# Allegro board CY15FRAMKIT-001 Layout.brd
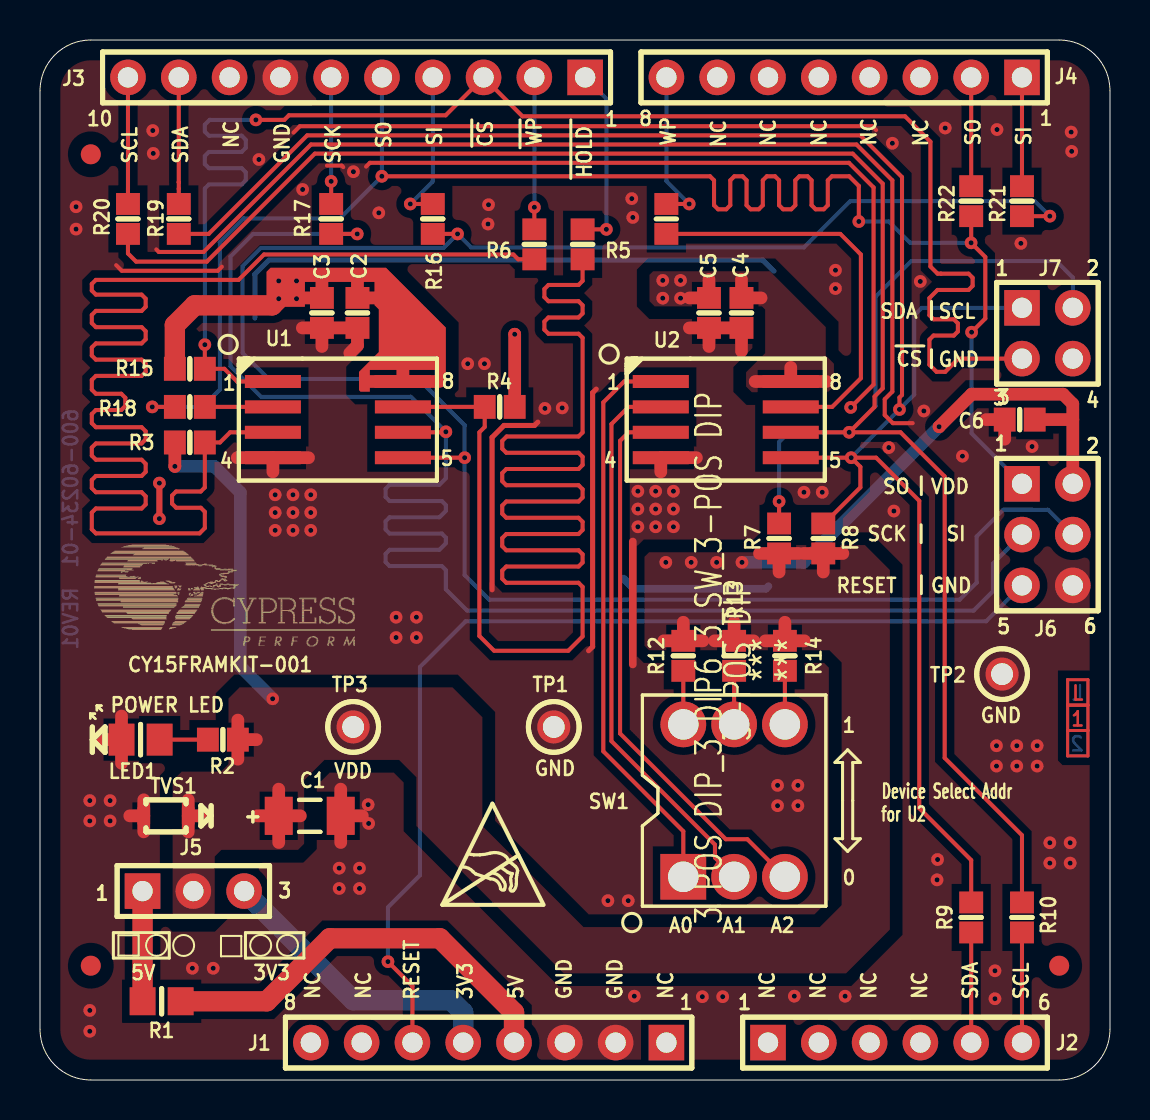
[diagram p0: board, top side]
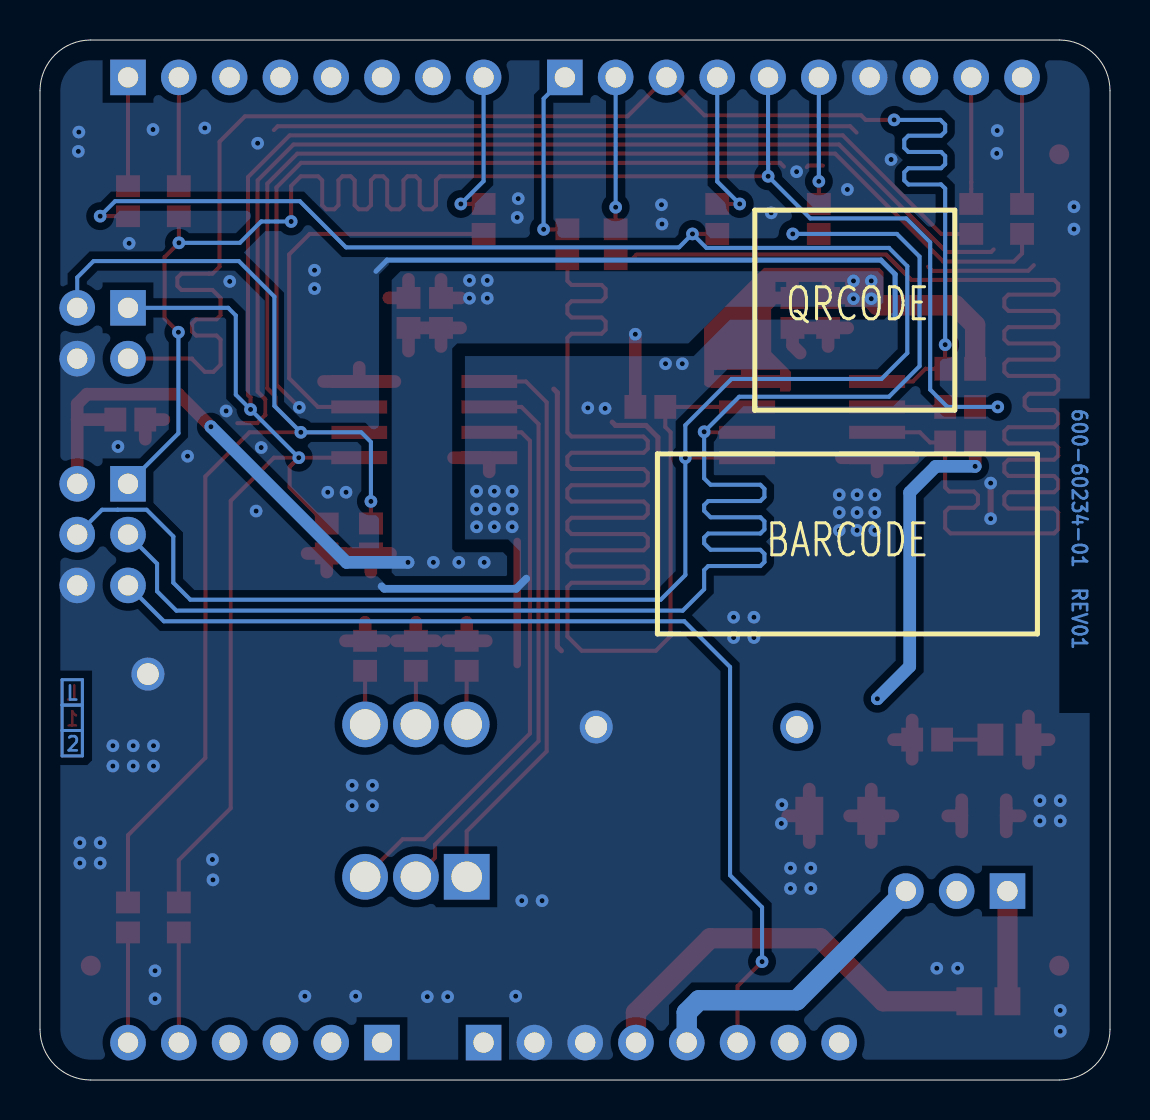
[diagram p1: board, bottom side, seen from below]

Outline 53.5 x 52 mm; copper layers: TOP, BOTTOM. Coordinates in mm from the lower left corner of the outline.
Outline path: 0,49.46 arc(0.74,51.26) 2.54,52 50.96,52 arc(52.76,51.26) 53.5,49.46 53.5,2.54 arc(52.76,0.74) 50.96,0 2.54,0 arc(0.74,0.74) 0,2.54 0,49.46

## Design rules (mm)
net group GRP2: nets SCL SDA
net group PWR_PH: nets 3V3 5V
net group GRP1: nets A0 A1 A2
net group GRP3: nets CS# HOLD# SCK SI SO WP#
nets with their own width: min track width 0.635; nets VDD VSS

## Placement (name value [footprint] x y rotation side)
C1  10 uF  [RC1206]  13.49 13.21 0 top
C2  0.1 uF  [C-CC0603]  15.88 38.35 270 top
C3  1 uF  [C-CC0603]  14.1 38.35 270 top
C4  0.1 uF  [C-CC0603]  35.08 38.35 270 top
C5  1 uF  [C-CC0603]  33.45 38.35 270 top
C6  0.1 uF  [C-CC0603]  48.99 33.02 180 top
J1  8x1 RECP  [RECP8X1-VERT]  31.32 1.87 270 top
J2  6x1 RECP  [HDR6X1]  36.4 1.87 270 top
J3  10x1 RECP  [RECP10X1-VERT]  27.26 50.13 270 top
J4  8x1 RECP  [RECP8X1-VERT]  49.1 50.13 270 top
J5  3 Pin Header  [HDR3X1]  5.13 9.45 270 top
J6  3X2 CONN FEMALE  [RECPT3X2_100]  49.1 29.81 0 top
J7  2X2 CONN FEMALE  [RECPT2X2_100]  49.1 38.61 0 top
LED1  Power LED Green  [CR-LED0805_A1K2]  5.03 17.02 0 top
NOREF  -  [unnamed]  50.96 5.71 0 top
NOREF#2  -  [#2]  -122.27 -285.33 0 top
NOREF#3  -  [#2]  309.53 -209.13 0 top
NOREF#4  -  [#2]  243.15 20.04 0 top
NOREF#5  -  [#2]  4.07 0 90 top
NOREF#6  -  [#2]  0 49.02 0 top
NOREF#7  -  [#2]  52.86 51.15 0 top
NOREF#8  -  [unnamed]  2.54 5.71 0 top
NOREF#9  -  [unnamed]  2.54 46.29 0 top
R1  0E  [R-CR0805]  6.08 3.94 180 top
R2  220 Ohm  [C-CC0603]  9.14 17.02 180 top
R3  4.7k  [C-CC0603]  7.49 31.88 0 top
R4  4.7k  [C-CC0603]  22.99 33.66 180 top
R5  0E  [C-CC0603]  27.13 41.78 90 top
R6  0E  [C-CC0603]  24.72 41.78 90 top
R7  4.7k  [C-CC0603]  36.96 27.08 90 top
R8  4.7k  [C-CC0603]  39.17 27.08 90 top
R9  30E  [C-CC0603]  46.56 8.13 270 top
R10  30E  [C-CC0603]  49.1 8.13 270 top
R11  0E  [C-CC0603]  31.32 43.05 90 top
R12  4.7k  [C-CC0603]  32.17 21.21 90 top
R13  4.7k  [C-CC0603]  34.71 21.21 90 top
R14  4.7k  [C-CC0603]  37.25 21.21 90 top
R15  4.7k  [C-CC0603]  7.49 35.56 0 top
R16  30E  [C-CC0603]  19.64 43.05 90 top
R17  30E  [C-CC0603]  14.56 43.05 90 top
R18  30E  [C-CC0603]  7.49 33.66 0 top
R19  30E  [C-CC0603]  6.94 43.05 90 top
R20  30E  [C-CC0603]  4.4 43.05 90 top
R21  30E  [C-CC0603]  49.1 43.94 90 top
R22  30E  [C-CC0603]  46.56 43.94 90 top
SW1  3-POS DIP  [DIP6_3_SW]  32.17 10.16 90 top
TP1  BLACK  [TP-43R_S]  25.69 17.65 0 top
TP2  BLACK  [TP-43R_S]  48.11 20.29 0 top
TP3  BLACK  [TP-43R_S]  15.66 17.65 0 top
TVS1  5V 350W  [SOD323]  6.3 13.21 180 top
U1  SPI F-RAM  [SOIC127P_800_600_8]  14.9 33.02 0 top
U2  I2C F-RAM  [SOIC127P_800_600_8]  34.29 33.02 0 top

## Library data of the parts
C1-C6 = C
J1 = CON6_1: room: USB
J2 = CON6_2
J3 = 10 PIN CON_0
J4 = 8 PIN CON_0
J5 = 3 PIN CON_5
J6 = CON6A_0
J7 = CON4AP_0
LED1 = LED_1
R1-R22 = R
SW1 = 3 POS DIP_3: Tolerance: ***; User Part Number: ***
TP1-TP3 = T POINT R
TVS1 = TVS 5V SOD-323_0
U1 = 8SOIC-SOCKET-208 mils_4
U2 = 8SOIC-SOCKET-150 mils_4

## Footprints (pads in the part's own frame, mm; a bottom-side part is the same pattern mirrored in y, then rotated)
C-CC0603
  rect 1.092x1.194 smd: 1(-0.749,0) 2(0.749,0)
CR-LED0805_A1K2
  rect 1.295x1.6 smd: 1(0.953,0) 2(-0.953,0)
DIP6_3_SW
  rect 2.286x2.286 hole 1.524: 1(0,0)
  round 2.286 hole 1.524: 2(7.62,0) 3(0,-2.54) 4(7.62,-2.54) 5(0,-5.08) 6(7.62,-5.08)
HDR3X1
  rect 1.778x1.778 hole 1.016: 1(0,0)
  round 1.778 hole 1.016: 2(0,2.54) 3(0,5.08)
HDR6X1
  rect 1.778x1.778 hole 1.016: 1(0,0)
  round 1.778 hole 1.016: 2(0,2.54) 3(0,5.08) 4(0,7.62) 5(0,10.16) 6(0,12.7)
R-CR0805
  rect 1.295x1.397 smd: 1(-0.952,0) 2(0.952,0)
RC1206
  rect 1.397x1.905 smd: 1(-1.55,0) 2(1.55,0)
RECP8X1-VERT
  rect 1.778x1.778 hole 1.016: 1(0,0)
  round 1.778 hole 1.016: 2(0,-2.54) 3(0,-5.08) 4(0,-7.62) 5(0,-10.16) 6(0,-12.7) 7(0,-15.24) 8(0,-17.78)
RECP10X1-VERT
  rect 1.778x1.778 hole 1.016: 1(0,0)
  round 1.778 hole 1.016: 2(0,-2.54) 3(0,-5.08) 4(0,-7.62) 5(0,-10.16) 6(0,-12.7) 7(0,-15.24) 8(0,-17.78) 9(0,-20.32) 10(0,-22.86)
RECPT2X2_100
  rect 1.778x1.778 hole 1.016: 1(0,0)
  round 1.778 hole 1.016: 2(2.54,0) 3(0,-2.54) 4(2.54,-2.54)
RECPT3X2_100
  rect 1.778x1.778 hole 1.016: 1(0,0)
  round 1.778 hole 1.016: 2(2.54,0) 3(0,-2.54) 4(2.54,-2.54) 5(0,-5.08) 6(2.54,-5.08)
SOD323
  rect 0.635x0.838 smd: 1(-1.113,0) 2(1.113,0)
SOIC127P_800_600_8
  rect 2.8x0.65 smd: 1(-3.25,1.905) 2(-3.25,0.635) 3(-3.25,-0.635) 4(-3.25,-1.905) 5(3.25,-1.905) 6(3.25,-0.635) 7(3.25,0.635) 8(3.25,1.905)
TP-43R_S
  round 1.651 hole 1.092: 1(0,0)
unnamed
  round 1 smd: (0,0)

## Nets
3V3: J1.5 J5.3
5V: J1.4 R1.1
VDD: C1.1 C2.1 C3.1 C4.1 C5.1 C6.1 J5.2 J6.2 R2.1 R3.1 R4.1 R7.1 R8.1 R12.2 R13.2 R14.2 R15.1 TP3.1(TP) TVS1.1(K) U1.8(VDD) U2.8(VDD)
VSS: C1.2 C2.2 C3.2 C4.2 C5.2 C6.2 J1.2 J1.3 J3.7 J6.6 J7.4 LED1.2(CATHODE) TP1.1(TP) TP2.1(TP) TVS1.2(A) U1.4(VSS) U2.4(VSS)
A0: SW1.1 U2.1(A0)
A1: SW1.3 U2.2(A1)
A2: SW1.5 U2.3(A2)
CS#: J3.3 J7.3 R15.2 U1.1(C\S\)
HOLD#: R4.2 R5.1 U1.7(H\O\L\D\)
RESET: J1.6 J6.5
SCK: J6.3 R17.1 U1.6(SCK)
SCL: J7.2 R7.2 R10.1 R20.1 U2.6(SCL)
SDA: J7.1 R8.2 R9.1 R19.1 U2.5(SDA)
SI: J6.4 R16.1 R21.1 U1.5(SI)
SO: J3.5 J6.1 R18.1 R22.1
WP: R11.1 U2.7(WP)
WP#: R3.2 R6.1 U1.3(W\P\)
N02914: LED1.1(ANODE) R2.2
N202221: R18.2 U1.2(SO)
N13079348: J2.5 R9.2
N13079350: J2.6 R10.2
N13080850: J3.2 R6.2
N13080876: J3.1 R5.2
N13080976: J4.8 R11.2
N13083260: J5.1 R1.2
N13171746: R12.1 SW1.2
N13171894: R13.1 SW1.4
N13171898: R14.1 SW1.6
N13187522: J3.4 R16.2
N13187530: J3.6 R17.2
N13188732: J3.9 R19.2
N13188744: J3.10 R20.2
N16778699: J4.1 R21.2
N16778735: J4.2 R22.2

Pads without a net: J1 1 7 8; J2 1 2 3 4; J3 8; J4 3 4 5 6 7

## Via types
v1: diameter 0.635, hole 0.254, TOP to BOTTOM, 134 vias

## Routing (per net, layer and track width the routed paths; a pad name or vN(x,y) marks a point on that pad's centre or on a via; arc(x,y) is an arc through that point)
3V3: length 15
  BOTTOM w1.016: J5.3 15.66,3.99 20.55,3.99 21.16,3.38 J1.5
5V: length 21
  TOP w1.016: R1.1 11.34,3.94 14.49,7.09 19.99,7.09 23.7,3.38 J1.4
VDD: length 94.3
  TOP w0.635: 11.94,11.87 C1.1 ; C1.1 13.02,13.21 ; C1.1 11.94,14.54 ; C1.1 10.86,13.21 ; R7.1 37.94,26.33 ; R7.1 35.98,26.33 ; R7.1 36.96,25.4 ; R12.2 33.15,21.96 ; R12.2 32.17,22.89 ; R12.2 31.19,21.96 ; R13.2 35.69,21.96 ; R13.2 34.71,22.89 ; R13.2 33.73,21.96 ; 51.64,33.02 J6.2 ; 51.64,33.02 C6.1 ; 51.64,33.02 51.64,33.8 51.16,34.29 46.58,34.29 v1(44.96,32.66) ; 13.12,39.1 C3.1 14.1,40.03 ; 36.06,39.1 C4.1 35.08,40.03 ; 37.54,34.92 39.32,34.92 ; 37.54,34.92 35.76,34.92 ; 37.54,34.92 37.54,35.63 ; R2.1 9.89,18 ; R2.1 9.89,16.04 ; R2.1 10.82,17.02 ; 7.41,12.41 TVS1.1 ; TVS1.1 8.11,13.21 ; TVS1.1 7.41,14.01 ; 32.47,39.1 C5.1 33.45,40.03 ; 15.88,40.03 C2.1 16.85,39.1 ; R8.1 40.15,26.33 ; R8.1 38.19,26.33 ; R8.1 39.17,25.4 ; 16.36,34.92 18.15,34.92 ; 18.15,34.92 18.15,35.63 ; 18.15,34.92 19.93,34.92 ; R14.2 38.23,21.96 ; R14.2 37.25,22.89 ; R14.2 36.27,21.96 ; R3.1 v1(6.74,30.68) ; R4.1 v1(23.74,37.29)
  TOP w1.016: R15.1 6.74,37.74 7.73,38.73 11.61,38.73 v1(11.94,39.07)
  BOTTOM w0.635: v1(11.63,19.06) 10.02,20.68 10.02,29.38 8.71,30.68 v1(6.74,30.68) ; v1(35.1,25.88) 38.18,25.88 v1(44.96,32.66)
  vias: v1(11.94,39.95) v1(12.83,39.95) v1(12.83,39.07) v1(31.14,39.98) v1(31.14,39.09) v1(31.29,25.88) v1(32.03,39.98) v1(32.03,39.09) v1(32.56,25.88) v1(33.83,25.88)
VSS: length 221.8
  TOP w0.203: 5.82,41.53 5.94,41.4 8.18,41.4 13.55,46.77 40.83,46.77 42.62,44.98 42.62,34.42 42.24,34.04 42.24,33.25 42.65,32.84 43.64,32.84 ; 16.31,45.67 16.5,45.86 40.45,45.86 41.68,44.63 41.68,34.77 v1(40.54,33.63) ; 15.16,45.64 15.09,45.72 14.35,45.72 ; 41.81,47.5 41.62,47.69 12.99,47.69 12.67,47.37 ; 9.09,40.67 8.89,40.46 4.09,40.46 3.81,40.74
  TOP w0.254: 27.81,34.54 27.63,34.36 27.63,21.66 27.43,21.46 ; 24.89,32.89 24.73,32.73 23.2,32.73 22.61,32.13 22.61,24.51
  TOP w0.305: v1(5.97,29.84) v1(5.97,28.07)
  TOP w0.381: 29.64,26.92 29.64,20.78
  TOP w0.635: U1.4 13.43,31.11 ; U1.4 9.86,31.11 ; U1.4 11.65,30.41 ; 5.19,12.41 TVS1.2 ; TVS1.2 5.19,14.01 ; TVS1.2 4.49,13.21 ; 31.04,30.41 U2.4 32.82,31.11 ; 13.12,37.6 C3.2 ; C3.2 14.1,36.68 ; C3.2 C2.2 15.88,36.73 15.49,36.35 ; 47.31,33.02 C6.2 48.24,32.04 ; 32.47,37.6 C5.2 ; C5.2 33.45,36.68 ; C5.2 C4.2 35.08,36.45 ; 15.04,11.87 C1.2 ; C1.2 15.04,14.54 ; C1.2 16.12,13.21 ; 3.05,17.02 LED1.2 ; LED1.2 4.08,15.84 ; LED1.2 4.08,18.2
  BOTTOM w0.254: 10.74,38.1 10.74,40.28 11.46,41 36.14,41 36.7,40.44
  BOTTOM w0.381: 29.18,25.07 29.69,24.56 36.3,24.56 36.42,24.69
  vias: v1(1.8,43.66) v1(1.8,42.55) v1(2.49,13.97) v1(2.49,12.95) v1(2.49,3.48) v1(2.49,2.44) v1(3.51,13.97) v1(3.51,12.95) v1(5.64,47.47) v1(5.66,46.33) v1(7.62,5.59) v1(8.66,5.59) v1(10.95,46.02) v1(11.76,29.26) v1(11.76,28.37) v1(11.76,27.48) v1(12.65,29.26) v1(12.65,28.37) v1(12.65,27.48) v1(13.13,44.53) v1(13.54,29.26) v1(13.54,28.37) v1(13.54,27.48) v1(14.96,10.59) v1(14.96,9.58) v1(15.67,45.42) v1(15.98,10.59) v1(15.98,9.58) v1(16.41,13.77) v1(16.43,12.83) v1(16.94,43.36) v1(17.81,23.14) v1(17.81,22.12) v1(18.82,23.14) v1(18.82,22.12) v1(21.39,35.81) v1(22.23,35.81) v1(22.43,43.76) v1(22.4,42.8) v1(25.25,33.58) v1(26.11,33.6) v1(28.4,8.97) v1(29.41,8.97) v1(29.59,44.07) v1(29.64,43.13) v1(29.72,4.19) v1(29.9,29.44) v1(29.9,28.55) v1(29.9,27.66) v1(30.78,29.44) v1(30.78,28.55) v1(30.78,27.66) v1(31.67,29.44) v1(31.67,28.55) v1(31.67,27.66) v1(33.12,4.17) v1(34.14,4.17) v1(36.88,14.73) v1(36.88,13.72) v1(37.72,4.19) v1(37.9,14.73) v1(37.9,13.72) v1(38.2,29.39) v1(39.12,29.39) v1(39.78,40.49) v1(39.78,39.57) v1(40.26,4.19) v1(42.44,31.62) v1(42.62,46.84) v1(42.7,28.45) v1(44.02,39.93) v1(44.2,33.45) v1(44.88,11.02) v1(44.86,10.01) v1(45.26,47.6) v1(46.13,31.19) v1(47.83,16.71) v1(47.83,15.7) v1(47.75,5.46) v1(47.75,4.06) v1(47.85,47.52) v1(48.84,16.71) v1(48.84,15.7) v1(49.05,41.83) v1(49.61,31.67) v1(49.86,16.71) v1(49.86,15.7) v1(50.5,11.86) v1(50.5,10.85) v1(51.51,11.86) v1(51.51,10.85) v1(51.56,47.4) v1(51.59,46.43)
A0: length 28.7
  TOP w0.203: 31.04,34.92 29.21,34.92 28.17,33.88 28.17,16.43 32.17,12.43 SW1.1
A1: length 28
  TOP w0.203: SW1.3 33.75,11.12 33.75,11.77 28.57,16.94 28.57,32.8 29.43,33.66 U2.2
A2: length 28.1
  TOP w0.203: SW1.5 35.37,12.04 34.29,12.04 29.01,17.32 29.01,31.96 29.43,32.38 31.04,32.38
CS#: length 83.9
  TOP w0.203: 11.65,34.92 9.86,34.92 9.22,35.56 R15.2 v1(8.24,36.77) ; J7.3 45.9,36.07 45.9,36.04 45.26,35.41 44.83,35.41 44.48,35.76 44.48,37.02 44.68,37.22 45.69,37.22 45.9,37.43 45.9,37.83 45.69,38.04 44.68,38.04 44.48,38.24 44.48,39.1 44.88,39.5 46.43,39.5 46.63,39.71 46.63,40.11 46.43,40.32 45.05,40.32 45.05,40.32 44.88,40.32 44.53,40.67 44.53,46.91 43.26,48.18 24.13,48.18 J3.3 20.28,48.23 12.45,48.23 12.22,48.01 v1(10.79,48.01)
  BOTTOM w0.203: v1(10.79,48.01) 8.48,48.01 8.24,47.76 8.24,47.42 8.45,47.22 10.08,47.22 10.29,47.01 10.29,46.61 10.08,46.4 8.45,46.4 8.24,46.2 8.24,45.79 8.45,45.59 10.08,45.59 10.29,45.39 10.29,44.98 10.08,44.78 8.45,44.78 8.24,44.57 v1(8.24,36.77)
HOLD#: length 84.8
  TOP w0.203: U1.7 R4.2 22.24,32.65 21.97,32.38 21.97,22.2 22.71,21.46 26.42,21.46 27.13,22.18 27.13,24.66 26.93,24.86 23.32,24.86 23.11,25.06 23.11,25.47 23.32,25.67 26.93,25.67 27.13,25.88 27.13,26.28 26.93,26.49 23.32,26.49 23.11,26.69 23.11,27.1 23.32,27.3 26.93,27.3 27.13,27.5 27.13,27.91 26.93,28.11 23.32,28.11 23.11,28.31 23.11,28.72 23.32,28.92 26.93,28.92 27.13,29.13 27.13,29.53 26.93,29.74 23.32,29.74 23.11,29.94 23.11,30.35 23.32,30.55 26.93,30.55 27.13,30.75 27.13,31.16 26.93,31.36 23.32,31.36 23.11,31.57 23.11,31.96 23.33,32.18 26.93,32.18 27.13,32.38 27.13,37.11 26.93,37.31 25.43,37.31 25.22,37.52 25.22,37.92 25.43,38.13 26.93,38.13 27.13,38.33 27.13,38.74 26.93,38.94 25.43,38.94 25.22,39.14 25.22,39.55 25.43,39.75 26.93,39.75 27.13,39.95 R5.1
RESET: length 51.7
  TOP w0.203: J1.6 18.62,4.69 v1(17.4,5.92)
  BOTTOM w0.203: J6.5 47.31,22.94 21.29,22.94 19,20.65 19,10.24 17.4,8.64 v1(17.4,5.92)
SCK: length 83.8
  TOP w0.203: v1(20.29,32.41) 20.27,32.38 18.15,32.38 ; R17.1 v1(15.86,42.3)
  BOTTOM w0.203: v1(15.86,42.3) 10.66,42.3 9.53,41.17 9.53,35.69 11.05,34.16 18.54,34.16 v1(20.29,32.41) 20.29,30.08 19.97,29.76 17.48,29.76 17.28,29.56 17.28,29.15 17.48,28.95 20.09,28.95 20.29,28.75 20.29,28.46 19.97,28.14 17.48,28.14 17.28,27.93 17.28,27.53 17.48,27.32 20.09,27.32 20.29,27.12 20.29,26.83 19.97,26.51 17.48,26.51 17.28,26.31 17.28,25.9 17.48,25.7 20.09,25.7 20.29,25.49 20.29,24.54 21.36,23.47 46.69,23.47 47.65,24.43 47.65,25.82 J6.3
SCL: length 113.9
  TOP w0.203: R10.1 49.1,12.24 45.24,16.1 45.24,30.18 43.03,32.38 v1(40.46,32.38) ; v1(40.46,32.38) 41.73,33.66 41.73,34.18 42.14,34.58 42.14,44.82 40.64,46.32 13.74,46.32 8.34,40.92 4.81,40.92 4.4,41.33 R20.1 ; v1(40.46,32.38) 37.54,32.38 ; R7.2 v1(36.96,28.93)
  BOTTOM w0.203: J7.2 51.64,40.13 50.83,40.94 43.56,40.94 41.78,39.17 41.78,33.71 v1(40.46,32.38) 37.44,32.38 36.96,31.9 v1(36.96,28.93)
SDA: length 97.5
  TOP w0.203: R19.1 8.43,42.3 13.36,47.23 41.02,47.23 43.1,45.15 43.1,34.25 42.98,34.13 v1(42.98,33.53) ; R8.2 39.22,27.83 41.02,29.63 41.02,30.66 v1(40.56,31.11) ; U2.5 v1(40.56,31.11) ; v1(40.56,31.11) 41.81,31.11 43.97,28.96 43.97,13.59 46.56,10.99 R9.1
  BOTTOM w0.203: v1(40.56,31.11) v1(42.98,33.53) 43.71,34.26 43.71,38.23 44.09,38.61 J7.1
SI: length 107.4
  TOP w0.203: R16.1 v1(20.88,42.3) ; v1(21.23,31.11) U1.5 ; R21.1 v1(50.5,43.19)
  BOTTOM w0.203: J6.4 50.4,28.51 49.62,28.51 49.62,28.51 48.17,28.51 46.84,27.18 46.84,24.87 45.99,24.02 22.47,24.02 21.23,25.25 v1(21.23,31.11) 21.23,32.74 18.92,35.05 11.43,35.05 10.13,36.35 10.13,40.69 11.05,41.61 20.18,41.61 v1(20.88,42.3) 21.55,41.63 38.2,41.63 40.51,43.94 49.75,43.94 v1(50.5,43.19)
SO: length 84.8
  TOP w0.203: v1(46.58,37.39) 47.27,38.07 47.27,41.15 v1(46.56,41.86) 46.56,41.86 R22.1 ; v1(17.09,45.19) 33.5,45.19 33.7,44.98 33.7,43.74 33.91,43.54 34.31,43.54 34.52,43.74 34.52,44.98 34.72,45.19 35.13,45.19 35.33,44.98 35.33,43.74 35.53,43.54 35.94,43.54 36.14,43.74 36.14,44.98 36.35,45.19 36.75,45.19 36.96,44.98 36.96,43.74 37.16,43.54 37.57,43.54 37.77,43.74 37.77,44.98 37.97,45.19 38.38,45.19 38.58,44.98 38.58,43.74 38.78,43.54 39.19,43.54 39.39,43.74 39.39,44.98 39.6,45.19 40.46,45.19 40.94,44.7 v1(40.94,42.93) ; v1(5.61,33.66) R18.1
  BOTTOM w0.203: J6.1 46.58,32.33 v1(46.58,37.39) ; v1(5.61,33.66) 8.13,33.66 8.99,34.52 8.99,41.88 10.19,43.08 14.99,43.08 v1(17.09,45.19) 17.09,45.81 17.1,45.81 J3.5 ; v1(40.94,42.93) 42.44,42.93 43.51,41.86 v1(46.56,41.86)
WP: length 20.4
  TOP w0.203: U2.7 39.61,33.66 41.05,35.09 41.05,41.27 40.02,42.3 R11.1
WP#: length 84
  TOP w0.203: R6.1 23.91,41.03 23.67,41.27 11.2,41.27 9.93,40.01 2.79,40.01 2.59,39.8 2.59,39.47 2.79,39.27 5.08,39.27 5.28,39.07 5.28,38.66 5.08,38.46 2.79,38.46 2.59,38.25 2.59,37.85 2.79,37.64 5.08,37.64 5.28,37.44 5.28,37.03 5.08,36.83 2.79,36.83 2.59,36.63 2.59,36.22 2.79,36.02 5.08,36.02 5.28,35.81 5.28,35.41 5.08,35.2 2.79,35.2 2.59,35 2.59,34.52 2.79,34.31 4.06,34.31 4.27,34.11 4.27,33.7 4.06,33.5 2.79,33.5 2.59,33.3 2.59,32.84 2.79,32.64 5.08,32.64 5.28,32.44 5.28,32.03 5.08,31.83 2.79,31.83 2.59,31.62 2.59,31.22 2.79,31.01 5.08,31.01 5.28,30.81 5.28,30.4 5.08,30.2 2.79,30.2 2.59,30 2.59,29.59 2.79,29.39 5.08,29.39 5.28,29.19 5.28,28.78 5.08,28.58 2.79,28.58 2.59,28.37 2.59,27.53 2.79,27.33 7.98,27.33 8.24,27.6 8.24,28.41 8.04,28.61 6.81,28.61 6.6,28.82 6.6,29.22 6.81,29.43 8.04,29.43 8.24,29.63 R3.2 9,31.88 9.51,32.38 11.65,32.38
N02914: length 2.4
  TOP w0.203: LED1.1 R2.2
N202221: length 3.4
  TOP w0.203: U1.2 R18.2
N13079348: length 5.5
  TOP w0.203: R9.2 J2.5
N13079350: length 5.5
  TOP w0.203: J2.6 R10.2
N13080850: length 7.6
  TOP w0.203: v1(24.72,43.64) R6.2
  BOTTOM w0.203: J3.2 v1(24.72,43.64)
N13080876: length 9.2
  TOP w0.203: R5.2 v1(28.32,42.53)
  BOTTOM w0.203: v1(28.32,42.53) 28.32,49.07 J3.1
N13080976: length 7.9
  TOP w0.203: v1(32.46,43.8) R11.2
  BOTTOM w0.203: J4.8 31.32,44.94 v1(32.46,43.8)
N13083260: length 5.5
  TOP w1.016: J5.1 5.13,3.94 R1.2
N13171746: length 2.7
  TOP w0.203: SW1.2 R12.1
N13171894: length 2.7
  TOP w0.203: SW1.4 R13.1
N13171898: length 2.7
  TOP w0.203: SW1.6 R14.1
N13187522: length 7.9
  TOP w0.203: v1(18.52,43.8) R16.2
  BOTTOM w0.203: J3.4 19.64,44.92 v1(18.52,43.8)
N13187530: length 6.3
  TOP w0.203: v1(14.56,44.93) R17.2
  BOTTOM w0.203: J3.6 v1(14.56,44.93)
N13188732: length 6.3
  TOP w0.203: J3.9 6.94,44.9 6.94,44.88 6.94,44.56 6.94,44.56 R19.2
N13188744: length 6.3
  TOP w0.203: R20.2 4.4,44.56 4.4,49.03 4.4,49.03 J3.10
N16778699: length 5.4
  TOP w0.203: J4.1 R21.2
N16778735: length 5.4
  TOP w0.203: J4.2 R22.2

## Copper pours and planes (outline as drawn; the poured copper is in the pictures)
VDD on TOP (solid shape): 20.29,37.62 20.29,34.77 20.23,34.71 19.96,34.66 19.8,34.89 19.8,35.5 16.49,35.5 16.49,34.42 16.03,34.42 15.95,34.49 15.95,35.41 16.94,36.4 16.94,38.53 16.74,38.73 16.73,38.73 16.73,39.9 13.25,39.9 13.25,38.67 13.23,38.66 11.48,38.66 11.33,38.81 11.33,40.41 11.53,40.61 17.3,40.61
VDD on TOP: 36.5,40.44 30.66,40.44 30.48,40.26 30.48,38.94 30.73,38.68 36.09,38.68 36.26,38.52 36.26,36.33 35.31,35.38 35.31,34.67 35.59,34.39 36.07,34.39 36.09,34.42 39.42,34.42 39.7,34.7 39.7,35.81 39.29,36.22 39.29,37.64
VDD on TOP: 6.63,8.31 6.88,8.05 8.48,8.05 8.74,8.31 8.74,11.18 9.07,11.51 12.9,11.51 13.21,11.81 13.21,14.99 14.22,16 17.96,16 18.82,15.14 18.82,12.7 26.19,5.33 40.31,5.33 42.49,7.52 42.49,25.5 41.25,26.75 36.3,26.75 35.94,26.39 30.45,26.39 30.23,26.16 30.23,21.72 30.45,21.49 39.47,21.49 40.08,20.88 40.08,8.74 38.99,7.65 27.18,7.65 22.12,12.7 22.12,18.14 20.62,19.63 9.98,19.63 9.42,19.08 9.42,15.8 9.04,15.42 7.09,15.42 6.63,14.96
VDD on BOTTOM: 35.74,25.2 35.92,25.37 35.92,40.01 35.48,40.44 11.61,40.44 11.33,40.16 11.33,38.89 11.56,38.66 19.25,38.66 21.08,36.83 32.64,36.83 32.89,36.58 32.89,26.54 32.74,26.39 30.35,26.39 30.15,26.19 30.15,25.25 30.2,25.2
VSS on TOP: 2.54,1.02 1.46,1.46 1.02,2.54 1.02,49.46 1.46,50.54 2.54,50.98 50.96,50.98 52.04,50.54 52.49,49.46 52.49,20.47 50.9,20.47 50.9,15.98 51.13,15.75 52.49,15.75 52.49,2.54 52.04,1.46 50.96,1.02 ; 1 cut-out
VSS on BOTTOM: 2.54,1.02 1.46,1.46 1.02,2.54 1.02,49.46 1.46,50.54 2.54,50.98 50.96,50.98 52.04,50.54 52.49,49.46 52.49,20.47 50.9,20.47 50.9,15.98 51.13,15.75 52.49,15.75 52.49,2.54 52.04,1.46 50.96,1.02
(no net) on TOP: 11.53,40.61 11.33,40.41 11.33,38.81 11.48,38.66 13.23,38.66 13.31,38.73 16.74,38.73 16.94,38.53 16.94,36.4 15.95,35.41 15.95,34.49 16.03,34.42 19.94,34.42 20.29,34.77 20.29,37.62 17.3,40.61

## Text on the board
BOTTOM: 2 | L | 600-60234-01  REV01 | SECONDARY SIDE 600-60234-01 REV01
Ref Des/Assembly Bottom: QRCODE | BARCODE | ASSEMBLY SECONDARY 600-60234-01 REV01
Board Geometry/Soldermask Bottom: SECONDARY SOLDERMASK 600-60234-01 REV01
Ref Des/Silkscreen Bottom: QRCODE | BARCODE | PDC-09547 REV 1 SECONDARY SILKSCREEN | SECONDARY SIDE SILKSCREEN 600-60234-01  REV01
User.Comments: 12/23/14 | ECAD | GVCH | SEMICONDUCTOR | 198 CHAMPION COURT | SAN JOSE, CA 95134 | (408) 943-2600 | ALPHA RELEASE | 01 | CYPRESS | C
TOP: L | 1 | PRIMARY SIDE 600-60234-01  REV01
Ref Des/Assembly Top: 1/2 | ASSEMBLY PRIMARY 600-60234-01 REV01 | CY15FRAMKIT-001 | ASSEMBLY DRAWING | 620-60232-01
Board Geometry/Soldermask Top: PRIMARY SOLDERMASK 600-60234-01 REV01
Ref Des/Silkscreen Top: for U2 | Device Select Addr | 10 | POWER LED | CY15FRAMKIT-001 | 5V | 4 | 1 | 3V3 | 8 | VDD | GND | A0 | A1 | A2 | RESET | 0 | SCK | SDA | SO | CS | SCL | SI | 6 | 5 | NC | WP | HOLD | HRM PRIA#114 | PRIMARY SIDE SILKSCREEN 600-60234-01  REV01 | PRIMARY SIDE SILKSCREEN
DIMENSION: 1. RoHS COMPLIANT CERTIFICATION OR MATERIAL DECLARATION REQUIRED. | 2. MATERIAL: | A. IS410 OR EQUIVALENT. MATERIAL MUST CONFORM TO UL94V-0. | B. USE HTE COPPER, AS SPECIFIED IN THE CROSS SECTION DIAGRAM. | 3. DRILLING: | A. DIAMETERS IN DRILL TABLE ARE FINISHED HOLE SIZES +/-.003 tol. | UNLESS OTHERWISE SPECIFIED IN DRILL TABLE. | B. TEARDROP ALLOWED ON ENTRY OF VIA ON EVERY TRACE LAYER. | 4. PLATING: | COPPER PLATING IN THRU-HOLES .001 min. | 5. MARKING: | A. SILKSCREEN IN WHITE NON-CONDUCTIVE EPOXY INK ON PRIMARY SIDE OF THE | BOARD OR BOTH SIDES IF APPLICABLE. | B. FABRICATOR TO PLACE DATE CODE, LOGO AND RoHS COMPILANT SYMBOL IN SILKSCREEN ON SECONDARY SIDE. | 6. FINAL FABRICATION: | A. SOLDRMASK PRIMARY AND SECONDARY SIDE OF BOARD USING LIQUID PHOTOIMAGABLE | MASK MATERIAL OVER BARE COPPER. PER IPC-SM-840. MASK ARTWORKS PROVIDED | ARE 1:1. SOLDERMASK COLOR **BLUE** | 7. FINISH: | A. SHALL BE ELECTROLESS NIKEL / IMMERSION GOLD(ENIG). | B. NICKEL THICKNESS: 100-200 MICROINCHES. | C. GOLD THICKNESS: 3-10 MICROINCHES. | 8. BOARDS SHALL BE PURCHASED FROM UL RECOGNIZED VENDORS ONLY. | FLAMABILITY RATING (94-V0). | 9. MANUFACTURE BOARD TO BE IN ACCORDANCE WITH PERFORMANCE STANDARD | IPC-6011/6012 CLASS 2 BOARD TO BE INSPECTED PER IPC-600-A CLASS 2. | 10.MAXIMUM WRAP OR TWIST SHALL NOT EXCEED .007 in/in. | 11.MINIMUM CONDUCTOR WIDTH 8.00 MILS | C. OVERALL METAL TO METAL THICKNESS AS SPECIFIED IN THE CROSS SECTION. | MINIMUM SPACING 8.00 MILS | PRIMARY SOLDERPASTE 600-60234-01 REV01 | 2 OF 2 | SILKSCREEN BOTTOM | DATE CODE & UL MARKING | NOTES:(UNLESS OTHERWISE SPECIFIED) | FABRICATION DRAWING | CY15FRAMKIT-001 | 610-60224-01
PAGE_OUTLINE: REV | SECONDARY SOLDERPASTE 600-60234-01 REV01
TOLERANCE_TOP: REV | SEMICONDUCTOR | 2700 162nd St. SW.  BLDG D | Lynnwood, WA  98087 | (425)-787-4466 | CYPRESS | 01 | C
User.8: FIGURE | SIZE | 10.0 | 40.0 | 42.99 | 60.0 | DRILL CHART: TOP to BOTTOM | ALL UNITS ARE IN MILS | TOLERANCE | +3.0/-3.0 | PLATED | QTY | 134 | 45 | 3 | 6
